# Altium PCB Chiller.PcbDoc (part 2 of 2)
Units mil, origin at the board's own origin, x right, y up, seen from the top; angles counter-clockwise.
Board outline 5081 x 4370 mil, 2 copper layers (Top Layer, Bottom Layer); 139 components, 120 nets, 485 pads, 196 vias.
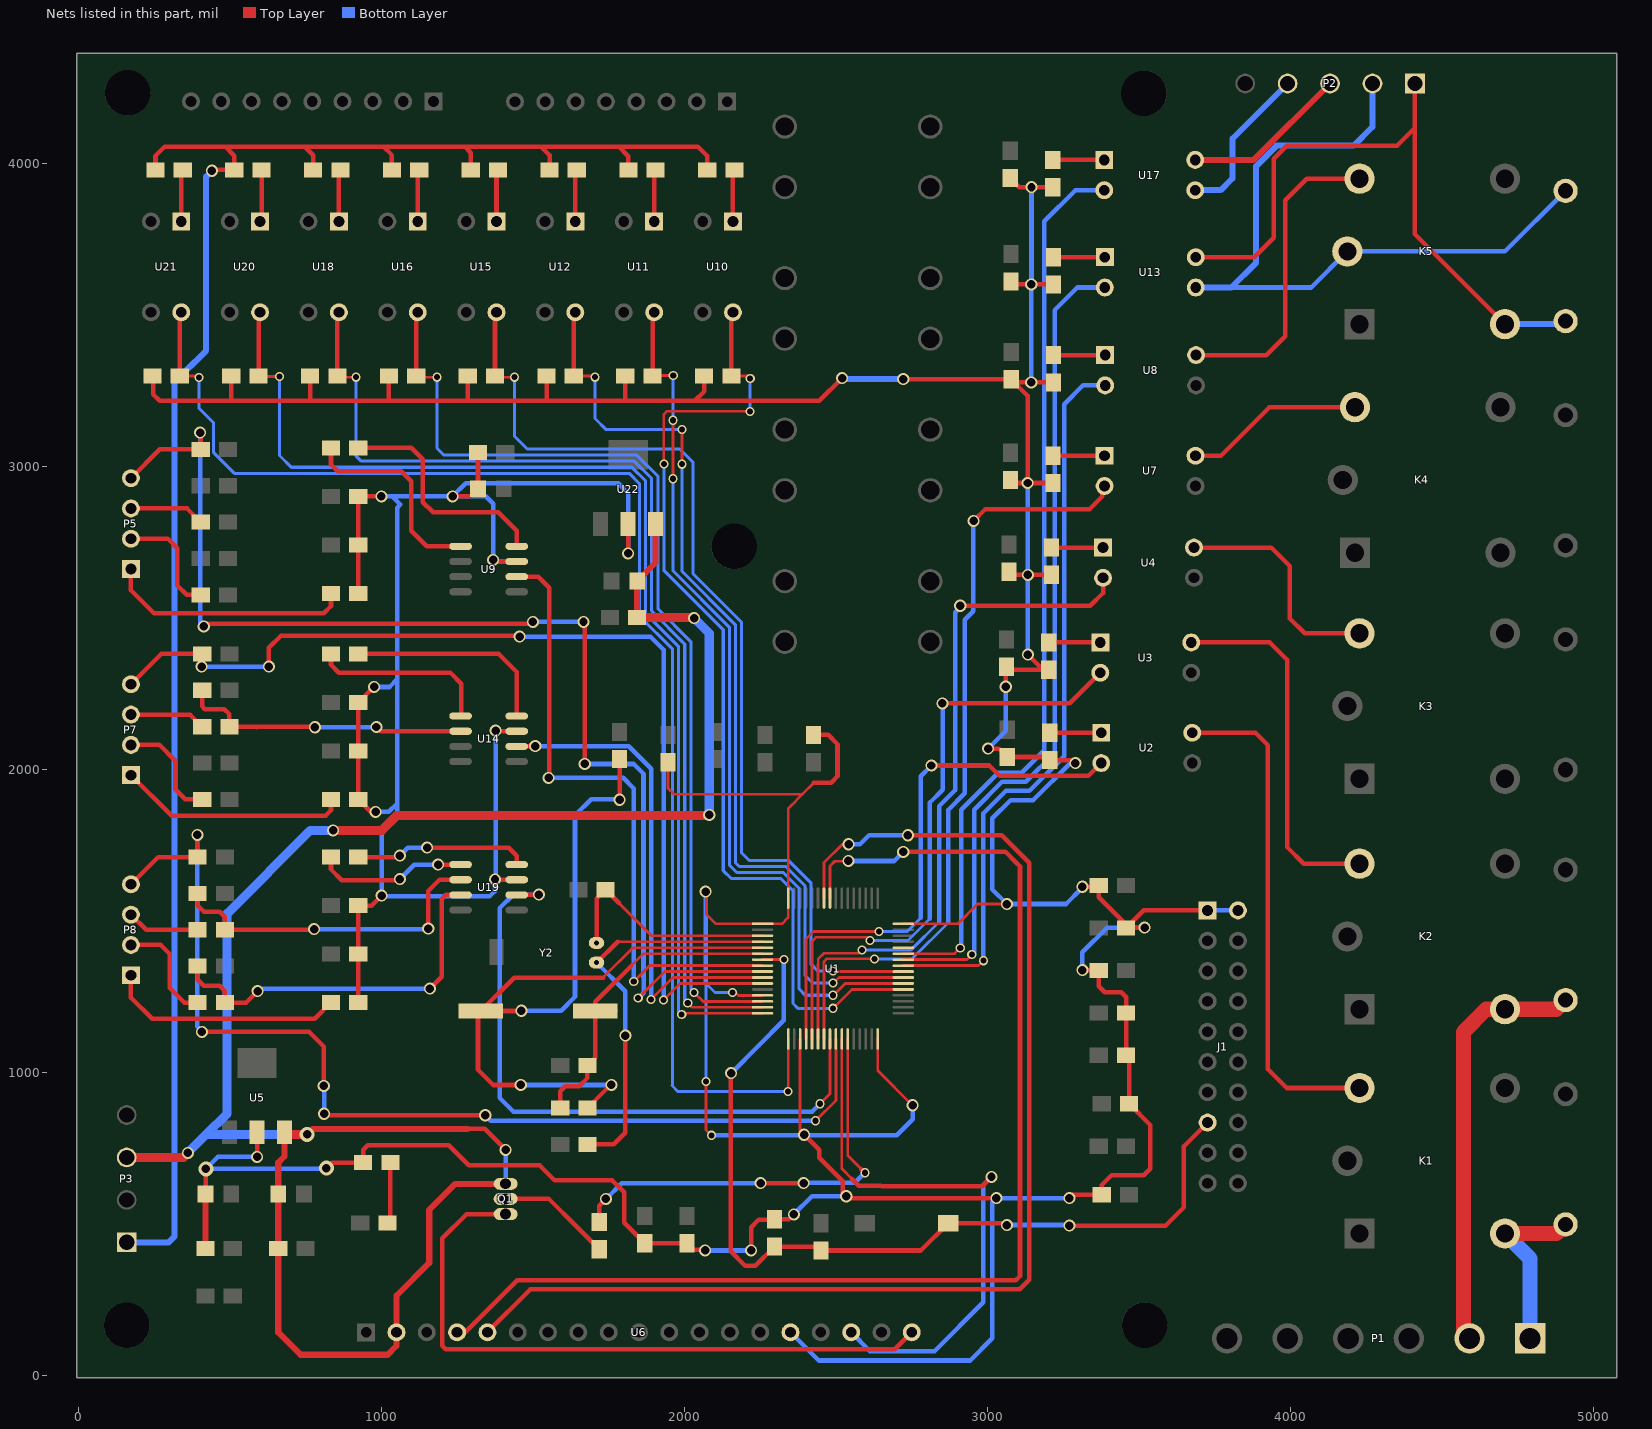
[diagram p2: the nets of this part, all layers, seen from the top]

## Via types
v1: diameter 40, hole 28, Top Layer to Bottom Layer, 144 vias
v2: diameter 30, hole 20, Top Layer to Bottom Layer, 47 vias
v3: diameter 50, hole 28, Top Layer to Bottom Layer, 5 vias

## Nets (pads, with @x,y where several pads share a name; then routed paths per layer and width w, separated by ;. In a path a pad name is that pad's centre, name@x,y a point inside that pad or via, vN(x,y) a via of type N, cw(c..) or ccw(c..) an arc to the next point about the centre after c; other vN are vias at no path point) (continued)
NetC31_1: C31.1 R38.2 U14.2 | length 967.1
  Top Layer w15: C31.1@409,2261 409,2208 418,2199 482,2199 499,2182 R38.2@499,2141 550,2141 587,2141 ; 589,2139 587,2141 ; v1(781,2139) 779,2141 587,2141 ; v1(984,2140) 998,2126 U14.2@1261.48,2126
  Bottom Layer w15: v1(781,2139) 983,2139 v1(984,2140)
NetC34_1: C34.1 R45.2 U19.3 | length 1262.8
  Top Layer w15: C34.1@394,1351 394,1306 414,1286 467,1286 484,1269 R45.2@484,1231 554,1231 v1(592,1269) ; v1(1160,1277) 1199,1316 1199,1572 1213,1586 U19.3@1261.48,1586
  Bottom Layer w15: v1(592,1269) 600,1277 v1(1160,1277)
NetC35_1: C35.1 R49.2 U19.2 | length 1107.6
  Top Layer w15: C35.1@394,1591 394,1551 415,1530 466,1530 467,1531 484,1514 R49.2@484,1471 776,1471 v1(778,1473) ; v1(1155,1475) 1155,1599 1192,1636 U19.2@1261.48,1636
  Bottom Layer w15: v1(778,1473) 1153,1473 v1(1155,1475)
NetD1_1: D1.1 R14.1 | length 202.9
  Top Layer w15: D1.1@1020.28,504.12 1030,513.84 R14.1@1030,703
NetK1_4: K1.4 U2.4 | length 1663.7
  Top Layer w15: U2.4@3675,2121 3800,2121 3884,2121 3925,2080 3925,1011 3987,949 K1.4@4227,949
NetK2_4: K2.4 U3.4 | length 1219.4
  Top Layer w15: U3.4@3672,2419 3822,2419 3931,2419 3988,2362 3988,1744 4043,1689 K2.4@4227,1689
NetK3_4: K3.4 U4.4 | length 778.6
  Top Layer w15: U4.4@3681,2732 3811,2732 ; 3825,2732 3811,2732 ; K3.4@4227,2449 4046,2449 3997,2498 3997,2671 3936,2732 3811,2732
NetK4_4: K4.4 U7.4 | length 592.3
  Top Layer w15: U7.4@3686,3035 3770,3035 3930,3195 K4.4@4212,3195
NetK5_4: K5.4 U8.4 | length 1043.1
  Top Layer w15: U8.4@3688,3367 3920,3367 3982,3429 3982,3878 4053,3949 K5.4@4227,3949
NetQ1_1: Q1.1 U6.19 | length 2207.3
  Top Layer w15: 1201,242 1201,208 ; Q1.1@1410,533 1281,533 1201,453 1201,208 ; U6.19@2750,143 2694,87 1213,87 1201,99 1201,208
NetQ1_2: Q1.2 R16.2 | length 546.1
  Top Layer w15: Q1.2@1410,583 1553,583 R16.2@1719,417 1600,536
NetR3_2: R3.2 U2.1 | length 170
  Top Layer w15: R3.2@3205,2121 U2.1@3375,2121
NetR8_2: R8.2 U3.1 | length 170
  Top Layer w15: R8.2@3202,2419 U3.1@3372,2419
NetR12_2: R12.2 U4.1 | length 170
  Top Layer w15: R12.2@3211,2732 U4.1@3381,2732
NetR15_2: R15.2 U7.1 | length 170
  Top Layer w15: R15.2@3216,3035 U7.1@3386,3035
NetR18_2: R18.2 U8.1 | length 170
  Top Layer w15: R18.2@3218,3367 U8.1@3388,3367
NetR19_1: R19.1 U10.1 | length 172.1
  Top Layer w15: U10.1@2160,3808 2160,3973 R19.1@2165,3978
NetR22_1: R22.1 U9.1 | length 690.4
  Top Layer w15: R22.1@834,3061 834,3006 856,2984 1066,2984 1099,2951 1099,2787 1150,2736 U9.1@1261.48,2736
NetR22_2: R22.2 U9.8 | length 769.9
  Top Layer w15: R22.2@924,3061 1099,3061 1137,3023 1137,2882 1171,2848 1386,2848 1446.52,2787.48 U9.8@1446.52,2736
NetR23_1: R23.1 U11.1 | length 172.1
  Top Layer w15: U11.1@1900,3808 1900,3973 R23.1@1905,3978
NetR27_2: R27.2 U13.1 | length 170
  Top Layer w15: R27.2@3217,3690 U13.1@3387,3690
NetR28_1: R28.1 U12.1 | length 172.1
  Top Layer w15: U12.1@1640,3808 1640,3973 R28.1@1645,3978
NetR31_1: R31.1 U15.1 | length 172.1
  Top Layer w15: U15.1@1380,3808 1380,3973 R31.1@1385,3978
NetR34_1: R34.1 U14.1 | length 599.7
  Top Layer w15: R34.1@834,2381 834,2345 860,2319 1228,2319 1264,2283 1264,2178.52 U14.1@1261.48,2176
NetR34_2: R34.2 U14.8 | length 692.7
  Top Layer w15: R34.2@924,2381 1387,2381 1446.52,2321.48 U14.8@1446.52,2176
NetR35_1: R35.1 U16.1 | length 172.1
  Top Layer w15: U16.1@1120,3808 1120,3973 R35.1@1125,3978
NetR37_2: R37.2 U17.1 | length 170
  Top Layer w15: R37.2@3215,4011 U17.1@3385,4011
NetR40_1: R40.1 U18.1 | length 172.1
  Top Layer w15: U18.1@860,3808 860,3973 R40.1@865,3978
NetR43_1: R43.1 U20.1 | length 172.1
  Top Layer w15: U20.1@600,3808 605,3813 R43.1@605,3978
NetR46_1: R46.1 U19.1 | length 504.1
  Top Layer w15: R46.1@834,1711 834,1670 869,1635 1058,1635 v1(1061,1638) ; v1(1187,1686) U19.1@1261.48,1686
  Bottom Layer w15: v1(1061,1638) 1109,1686 v1(1187,1686)
NetR46_2: R46.2 U19.8 | length 575.8
  Top Layer w15: R46.2@924,1711 1056,1711 v1(1061,1716) ; v1(1151,1742) 1420,1742 1446.52,1715.48 U19.8@1446.52,1686
  Bottom Layer w15: v1(1061,1716) 1087,1742 v1(1151,1742)
NetR47_1: R47.1 U21.1 | length 172.1
  Top Layer w15: U21.1@340,3808 340,3973 R47.1@345,3978
OSC_IN1: C2.2 U1.3 Y2.2 | length 768.3
  Top Layer w9: 1784.52,1558.48 1850.55,1492.45 1891.64,1451.36 2200.79,1451.36 2200.89,1451.46 2257.47,1451.46 U1.3@2257.57,1451.36
  Top Layer w15: Y2.2@1710,1427.57 1710,1573 C2.2@1740,1603 1784.52,1558.48
OSC_IN2: C1.2 R1.2 U1.5 Y1.1 | length 3047.3
  Top Layer w9: 1732,1313 1830.99,1411.99 U1.5@2257.57,1411.99
  Top Layer w15: v1(1460,959) 1369,959 1319,1009 1319,1194 Y1.1@1328,1203 ; v1(1462,1204) 1461,1203 Y1.1@1328,1203 ; R1.2@1680,883 1756,959 v1(1759,959) ; 1732,1313 1438,1313 Y1.1@1328,1203 ; v1(1786,1900) C1.2@1786,2034
  Bottom Layer w15: v1(1460,959) v1(1759,959) ; v1(1462,1204) 1593,1204 1639,1250 1639,1777 ; 1639,1806 1639,1777 ; v1(1786,1900) 1784,1902 1692,1902 1639,1849 1639,1777
OSC_OUT1: C7.2 U1.4 Y2.1 | length 1416.2
  Top Layer w9: Y2.1@1710,1363 1778.68,1431.68 1779.67,1431.68 U1.4@2257.57,1431.68
  Top Layer w15: C7.2@1680,763 1767,763 1805,801 v1(1805,1122) ; Y2.1@1710,1363 1711,1363 1779.67,1431.68
  Bottom Layer w15: Y2.1@1710,1363 1805,1268 v1(1805,1122)
OSC_OUT2: C6.2 R1.1 U1.6 Y1.2 | length 1051.4
  Top Layer w9: 1824,1351.57 1864.73,1392.31 U1.6@2257.57,1392.31
  Top Layer w15: R1.1@1590,883 1590,938 1607,955 1649,955 1653,955 1680,982 C6.2@1680,1023 1706,1049 Y1.2@1706,1203 1706,1233.57 1824,1351.57 ; Y1.2@1768,1198 Y1.2@1774,1204
OUT1+: C44.2 K5.1 P2.1 U13.4 | length 2188.1
  Top Layer w15: U13.4@3687,3690 3880,3690 3944,3754 3944,4015 3987,4058 4351,4058 4410,4117 ; P2.1@4410,4263 4410,4117 ; K5.1@4707,3469 4410,3766 4410,4117
  Top Layer w50: C44.2@4897,3469 C44.2@4907,3479
  Bottom Layer w10: C44.2@4897,3469 C44.2@4907,3479
  Bottom Layer w20: K5.1@4707,3469 C44.2@4897,3469
OUT1-: C44.1 K5.2 P2.2 U13.3 | length 2369.8
  Bottom Layer w15: U13.3@3685,3592 U13.3@3687,3590 ; 3804,3590 4068,3590 K5.2@4187,3709 4707,3709 C44.1@4907,3909
  Bottom Layer w20: U13.3@3687,3590 3804,3590 3886,3672 3886,3990 3954,4058 4208,4058 4270,4120 P2.2@4270,4263
OUT2+: P2.3 U17.4 | length 549.4
  Top Layer w20: U17.4@3685,4011 3847,4011 3878,4011 P2.3@4130,4263
OUT2-: P2.4 U17.3 | length 527.5
  Bottom Layer w20: U17.3@3685,3911 3769,3911 3808,3950 3808,4039 3808,4081 P2.4@3990,4263
PIN_IN1: U1.8 U9.6 | length 2640.1
  Top Layer w9: 1885.47,1352.94 U1.8@2257.57,1352.94 1885.47,1352.94 ; 1885.47,1352.94 1867.5,1334.97 v2(1832.82,1300.29) 1885.47,1352.94
  Top Layer w15: U9.6@1446.52,2636 1517.5,2636 1553.5,2600 1553.5,2040 ; v1@1553.5,1973.5 1553.5,2040 ; v1@1553.5,1984.5 1553.5,2040
  Bottom Layer w15: v1@1541,1972 v1(1552,1972) 1798,1972 1832.82,1937.18 v2(1832.82,1300.29)
PIN_IN2: P5.4 R26.1 U1.9 | length 4146.7
  Top Layer w9: v2(1847.5,1245.29) 1935.47,1333.25 U1.9@2257.57,1333.25
  Top Layer w15: P5.4@174,2961 269,3056 R26.1@404,3056 ; R26.1@402,3058 R26.1@404,3056 ; v1(402,3111) 404,3109 R26.1@404,3056 ; v1(414,2472) 423,2481 1494,2481 v1(1500,2487) ; v1(1667,2487) 1671,2483 v1(1671,2018)
  Bottom Layer w15: v1(402,3111) 402,2484 v1(414,2472) ; v1@1502,2489 v1(1500,2487) v1(1667,2487) ; v1(1671,2018) 1833,2018 1865,1986 1865,1417 ; v2(1847.5,1245.29) 1865.32,1263.1 1865.32,1314.07 1865,1314.38 1865,1417 ; 1865,1457 1865,1417
PIN_IN3: U1.10 U14.6 | length 1634.4
  Top Layer w9: v2(1890,1241) 1962.57,1313.57 U1.10@2257.57,1313.57
  Top Layer w15: U14.6@1446.52,2076 1447.52,2077 v1(1508,2077)
  Bottom Layer w15: v1(1508,2077) 1816,2077 1890.32,2002.68 1890.32,1241.32 v2(1890,1241)
PIN_IN4: P7.4 R39.1 U1.11 | length 3446.2
  Top Layer w9: v2(1931,1239) 1985.88,1293.88 U1.11@2257.57,1293.88
  Top Layer w15: P7.4@174,2281 274,2381 R39.1@409,2381 409,2341 v1(407,2339) ; v1(629,2339) 629,2401 669,2441 1453,2441 v1(1456,2438)
  Bottom Layer w15: v1(407,2339) v1(629,2339) ; v1(1456,2438) 1888,2438 1931,2395 v2(1931,1239)
PIN_IN5: U1.24 U19.6 | length 2161.8
  Top Layer w9: v2(2447,897) 2480.01,930.01 U1.24@2480.01,1110.81
  Top Layer w15: U19.6@1446.52,1586 1447.52,1587 v1(1520,1587)
  Bottom Layer w15: v1(1520,1587) 1435,1587 1390,1542 1390,917 1436,871 2421,871 v2(2447,897)
PIN_IN6: P8.4 R50.1 U1.25 | length 3563.7
  Top Layer w9: v2(2433,841) 2499.69,907.69 U1.25@2499.69,1110.81
  Top Layer w15: P8.4@174,1621 264,1711 R50.1@394,1711 393,1712 v1(393,1784) ; v1(408,1134) 762,1134 810,1086 v1(810,956) ; v1(811,864) 816,859 v1(1343,859)
  Bottom Layer w15: v1(393,1784) 393,1152 408,1137 v1(408,1134) ; v1(810,956) 811,955 v1(811,864) ; v1@1345.5,861.5 v1(1343,859) 1361,841 v2(2433,841)
PIN_IN7: R20.2 U1.37 U10.4 | length 3287.8
  Top Layer w9: v2(1932,3008) 1932,3171 1943,3182 2215,3182 v2(2216,3181) ; R20.2@2155,3298 2209,3298 v2(2217,3290) ; v2(2490,1212) 2552.2,1274.2 U1.37@2722.13,1274.2
  Top Layer w15: R20.2@2155,3298 2155,3503 U10.4@2160,3508
  Bottom Layer w10: v2(1932,3008) 1932,2657 2128,2461 2128,1666 2154,1640 2318,1640 2358,1600 2358,1228 2374,1212 v2(2490,1212) ; v2(2216,3181) 2216,3289 v2(2217,3290)
PIN_IN8: R24.2 U1.38 U11.4 | length 2936.4
  Top Layer w9: R24.2@1895,3298 1897,3300 v2(1963,3300) ; v2(1962,2959) v2(1962,3152) ; v2(2490,1255) 2491.72,1255 2530.6,1293.88 U1.38@2722.13,1293.88
  Top Layer w15: R24.2@1895,3298 1895,3503 U11.4@1900,3508
  Bottom Layer w10: v2(1962,2959) 1962,2655.28 2148,2469.28 2148,1685 2173,1660 2326.28,1660 2378,1608.28 2378,1276 2399,1255 v2(2490,1255) ; v2(1962,3152) 1962,3299 v2(1963,3300)
PIN_IN9: R29.2 U1.39 U12.4 | length 3122.6
  Top Layer w9: R29.2@1635,3298 1701,3298 v2(1705,3294) ; v2(1992,3007) v2(1992,3121) ; v2(2490,1295) 2491.72,1295 2510.29,1313.57 U1.39@2722.13,1313.57
  Top Layer w15: R29.2@1635,3298 1635,3503 U12.4@1640,3508
  Bottom Layer w10: v2(1705,3294) 1705,3158 1742,3121 v2(1992,3121) ; v2(1992,3007) 1992,2653.57 2168,2477.57 2168,1693.28 2181.28,1680 2334.57,1680 2398,1616.57 2398,1321 2424,1295 v2(2490,1295)
PIN_IN10: R32.2 U1.40 U15.4 | length 3305.2
  Top Layer w9: R32.2@1375,3298 1379,3294 v2(1439,3294) ; v2(2490,1335) 2491.75,1333.25 U1.40@2722.13,1333.25
  Top Layer w15: R32.2@1375,3298 1375,3503 U15.4@1380,3508
  Bottom Layer w10: v2(1439,3294) 1439,3099 1481,3057 1984.43,3057 2028,3013.43 2028,2645.85 2188,2485.85 2188,1725 2213,1700 2342.85,1700 2418,1624.85 2418,1357 2440,1335 v2(2490,1335)
PIN_IN11: R36.2 U1.14 U16.4 | length 3274
  Top Layer w9: R36.2@1115,3298 1119,3294 v2(1184,3294) ; v2(2032.19,1264.38) 2062.07,1234.5 2257.24,1234.5 U1.14@2257.57,1234.83
  Top Layer w15: R36.2@1115,3298 1115,3503 U16.4@1120,3508
  Bottom Layer w10: v2(1184,3294) 1184,3060 1207,3037 1842.85,3037 1912,2967.85 1912,2530.67 2021,2421.67 2021,1275.57 v2(2032.19,1264.38)
PIN_IN12: R41.2 U1.15 U18.4 | length 3573.1
  Top Layer w9: R41.2@855,3298 859,3294 v2(916,3294) ; v2(2011,1229) 2024.86,1215.14 U1.15@2257.57,1215.14
  Top Layer w15: R41.2@855,3298 855,3503 U18.4@860,3508
  Bottom Layer w10: v2(916,3294) 916,3035 934,3017 1834.57,3017 1892,2959.57 1892,2522.39 2001,2413.39 2001,1239 v2(2011,1229)
PIN_IN13: R44.2 U1.16 U20.4 | length 3861.6
  Top Layer w9: R44.2@595,3298 597,3296 v2(664,3296) ; v2(1991,1192) 1994.46,1195.46 U1.16@2257.57,1195.46
  Top Layer w15: R44.2@595,3298 595,3503 U20.4@600,3508
  Bottom Layer w10: v2(664,3296) 664,3036 703,2997 1826.28,2997 1872,2951.28 1872,2514.1 1981,2405.1 1981,1202 v2(1991,1192)
PIN_IN14: R48.2 U1.17 U21.4 | length 4590.4
  Top Layer w9: R48.2@335,3298 394,3298 v2(399,3293) ; v2(2342,937) 2342.21,937.21 U1.17@2342.21,1110.81
  Top Layer w15: R48.2@335,3298 335,3503 U21.4@340,3508
  Bottom Layer w10: v2(399,3293) 399,3191 447,3143 447,3045 515,2977 1818,2977 1852,2943 1852,2505.82 1961,2396.82 1961,959 1959,957 1979,937 v2(2342,937)
PIN_OUT1: U1.20 U2.2 | length 1846.5
  Top Layer w9: U1.20@2401.27,1110.81 2401.27,1257.73 2401.27,1440.27 2426,1465 2641,1465 v2(2642,1466)
  Top Layer w15: v1(2815,2013) 3006.18,2013 3040.68,1978.5 3332.5,1978.5 U2.2@3375,2021
  Bottom Layer w10: v2(2642,1466) 2736,1466 2780,1510
  Bottom Layer w15: 2780,1510 2780,1978 v1(2815,2013)
PIN_OUT2: U1.21 U3.2 | length 2042.5
  Top Layer w9: U1.21@2420.95,1110.81 2420.95,1433.08 2433.87,1446 2601,1446 v2(2612,1435)
  Top Layer w15: v1(2851,2218) 3271,2218 U3.2@3372,2319
  Bottom Layer w10: v2(2612,1435) 2613,1436 2737.82,1436 2809.82,1508 2810,1508
  Bottom Layer w15: 2810,1508 2810,1890.9 2852.5,1933.4 2852.5,2216.5 v1(2851,2218)
PIN_OUT3: U1.22 U4.2 | length 2323.6
  Top Layer w9: U1.22@2440.64,1110.81 2440.64,1357 2441.32,1357.69 2441.32,1374.19 2461.13,1394 2575.43,1394 v2(2585.93,1404.5)
  Top Layer w15: v1(2910,2540) 3339,2540 3381,2582 U4.2@3381,2632
  Bottom Layer w10: v2(2585.93,1404.5) 2586.43,1405 2748,1405 2840,1497
  Bottom Layer w15: 2840,1497 2840,1878.47 2893.5,1931.97 2893.5,2518.5 2910,2535 v1(2910,2540)
PIN_OUT4: U1.23 U7.2 | length 2578.4
  Top Layer w9: U1.23@2460.32,1110.81 2460.32,1366.32 2469,1375 v2(2627,1375)
  Top Layer w15: v1(2954,2820) 2993,2859 3337,2859 3379,2901 3379,2935 U7.2@3386,2935
  Bottom Layer w10: v2(2627,1375) 2751,1375 2871,1495
  Bottom Layer w15: 2871,1495 2871,1867.04 2925,1921.04 2925,2494 2952.5,2521.5 2952.5,2818.5 v1(2954,2820)
PIN_OUT5: U1.41 U8.2 | length 2457.3
  Top Layer w9: U1.41@2722.13,1352.94 2946.18,1352.94 2969.94,1352.94 v2(2986,1369)
  Bottom Layer w15: v2(2986,1369) 2986,1428 ; 2986,1394 2986,1854.76 3060.24,1929 3138,1929 3253,2044 3253,3205 3315,3267 U8.2@3388,3267
PIN_OUT6: U1.42 U13.2 | length 2839.2
  Top Layer w9: 2847,1372.62 U1.42@2722.13,1372.62 2931.62,1372.62 v2(2948,1389)
  Bottom Layer w15: v2(2948,1389) 2956,1397 2956,1867.19 3047.81,1959 3125.57,1959 3221,2054.43 3221,3515 3296,3590 U13.2@3387,3590
PIN_OUT7: U1.43 U17.2 | length 2993.6
  Top Layer w9: U1.43@2722.13,1392.31 2891.31,1392.31 v2(2910,1411)
  Bottom Layer w15: v2(2910,1411) 2913.5,1414.5 2913.5,1867.12 3035.38,1989 3113.15,1989 3187,2062.85 3187,3808 3290,3911 U17.2@3385,3911
PIN_OUT8: U1.44
PUMP: C40.2 K1.1 P1.1 | length 592.8
  Top Layer w50: K1.1@4707,469 4877,469 C40.2@4907,499
  Bottom Layer w50: K1.1@4707,469 4790,386 P1.1@4790,123
PWM: R16.1 U1.27 | length 1455
  Top Layer w9: U1.27@2539.06,1110.81 2539.06,725.46 v2(2595.02,669.5)
  Top Layer w15: R16.1@1719,507 1719,561 v1(1741,583) ; v1(2251,635) v1(2393,635) ; 2584.02,680.5 v2(2595.02,669.5)
  Bottom Layer w15: v1(1741,583) 1793,635 v1(2251,635) ; v1(2393,635) 2394,636 2561.52,636 v2(2595.02,669.5)
R/W: U1.58 U6.5 | length 4103.9
  Top Layer w9: U1.58@2460.32,1575.38 2460.32,1692.75 2520.57,1753 v1(2541.52,1753)
  Top Layer w15: U6.5@1350,143 1492.03,285.03 3105.75,285.03 3137,316.28 3137,1692.43 3046.43,1783 v1(2737.5,1783)
  Bottom Layer w15: v1(2541.52,1753) 2579,1753 2609,1783 v1(2737.5,1783)
RESET: C13.2 J1.15 R9.1 REST1.1 U1.7 | length 3049
  Top Layer w9: U1.7@2257.57,1372.62 2327.62,1372.62 v2(2328,1373)
  Top Layer w15: v1(2154,998) 2153,997 2153,410 2200,363 2234,363 R9.1@2297,426 2437,426 C13.2@2450,413 2780,413 REST1.1@2870,503 3058,503 v1(3064,497) ; v1(3270,495) 3587,495 3648,556 3648,757 J1.15@3726,835
  Bottom Layer w15: v1(2154,998) 2244.5,1088.5 ; 2258.5,1102.5 2244.5,1088.5 ; v2(2328,1373) 2328,1172 2244.5,1088.5 ; v1(3064,497) 3268,497 v1(3270,495)
RS: U1.57 U6.4 | length 4065.9
  Top Layer w9: U1.57@2480.01,1575.38 2480.03,1681.34 2495.84,1697.16 2507.16,1697.16 2540.16,1697.16 v1(2541,1698)
  Top Layer w15: U6.4@1250,143 1276.42,143 1448.45,315.03 3093.32,315.03 3107,328.71 3107,1680 3096,1691 ; v1(2722,1728) 3059,1728 3096,1691 ; 3090,1697 3096,1691
  Bottom Layer w15: v1(2541,1698) 2692,1698 v1(2722,1728)
RST: U1.26 U6.17 | length 1914.1
  Top Layer w9: U1.26@2519.38,1110.81 2519.38,682.62 2552.52,649.48
  Top Layer w15: 2552.52,649.48 2575,627 2649,627 2651,625 2982,625 v1(3013,656)
  Bottom Layer w15: U6.17@2550,143 2612,81 2825,81 2985.94,241.94 2985.94,628.94 v1@3011,654 ; v1@3011,656 v1@3011,654 ; v1(3013,656) v1@3011,654
"TEMP1 DRV+": P5.1 R17.1 | length 813.4
  Top Layer w15: P5.1@174,2661 174,2591 250,2515 810,2515 834,2539 R17.1@834,2581
"TEMP1 SEN+": P5.2 R21.1 | length 378.7
  Top Layer w15: P5.2@174,2761 296,2761 327,2730 327,2607 358,2576 R21.1@404,2576
"TEMP1 SEN-": P5.3 R25.1 | length 248.6
  Top Layer w15: P5.3@174,2861 359,2861 R25.1@404,2816
"TEMP2 DRV+": P7.1 R30.1 | length 759
  Top Layer w15: P7.1@174,1981 308,1847 816,1847 834,1865 R30.1@834,1901
"TEMP2 SEN+": P7.2 R33.1 | length 364.6
  Top Layer w15: P7.2@174,2081 268,2081 320,2029 320,1935 353,1902 408,1902 R33.1@409,1901
"TEMP2 SEN-": P7.3 R38.1 | length 251.6
  Top Layer w15: P7.3@174,2181 369,2181 R38.1@409,2141
"TEMP3 DRV+": P8.1 R42.1 | length 785.1
  Top Layer w15: P8.1@174,1321 174,1247 243.73,1177.27 780.27,1177.27 R42.1@834,1231
"TEMP3 SEN+": P8.2 R45.1 | length 364.3
  Top Layer w15: P8.2@174,1421 272,1421 302,1391 302,1279 350,1231 R45.1@394,1231
"TEMP3 SEN-": P8.3 R49.1 | length 240.7
  Top Layer w15: P8.3@174,1521 224,1471 R49.1@394,1471
VALVE: C41.2 K2.1 P1.2 | length 1399.8
  Top Layer w50: P1.2@4590,123 4570,143 4570,1072 4570,1134 4645,1209 K2.1@4707,1209 4877,1209 C41.2@4907,1239
VCC3.3: C3.2 C4.1 C5.2 C8.2 C9.1 C10.2 C11.1 C12.1 C14.2 C15.1 C16.1 C17.1 C20.2 C21.2 C25.2 C29.2 J1.1 J1.2 R3.1 R4.2 R5.2 R6.2 R7.2 R8.1 R9.2 R12.1 R14.2 R15.1 R18.1 R20.1 R24.1 R27.1 R29.1 R32.1 R36.1 R37.1 R41.1 R44.1 R48.1 U1.1 U1.13 U1.19 U1.32 U1.48 U1.64 U5.2 U6.15 | length 19209.5
  Top Layer w9: C12.1@1946,2024 1946,1938 1965.5,1918.5 2389.5,1918.5 ; v2(2071,971) 2071,811 v2(2089,793) ; v1@2073,1594 2073,1522 2104.27,1490.73 U1.1@2257.57,1490.73 ; v2(2158,1264) 2168.88,1264 2178.37,1254.51 U1.13@2257.57,1254.51 ; U1.1@2258.73,1490.73 2321.73,1490.73 2342.21,1511.21 U1.64@2342.21,1575.38 2342.21,1871.21 2347.64,1876.64 ; 2354.46,1883.46 2347.64,1876.64 ; v1@2381.58,808.42 U1.19@2381.58,1110.81 ; 2427,1956 2389.5,1918.5 ; U1.32@2637.49,1110.81 2637.49,1007.51 v1(2753,892) ; U1.48@2722.13,1490.73 2901.73,1490.73 2967,1556 v1(3064,1556) ; 2347.64,1876.64 2389.5,1918.5
  Top Layer w15: R48.1@245,3298 248,3295 248,3237 269,3216 506,3216 ; C17.1@420,599.03 421,600.03 v3(421,682) ; R44.1@505,3298 505,3217 506,3216 ; v1(590,722) U5.2@590,803 ; R41.1@765,3298 765,3218 767,3216 ; v3(819,685) 837,703 R14.2@940,703 940,745 955,760 1222,760 1288,694 1522,694 1572,644 1762,644 1801,605 1801,505 C15.1@1869,437 C3.2@2009,437 2031,415 2066,415 v1(2068,413) ; R36.1@1025,3298 1025,3217 1026,3216 ; R32.1@1285,3298 1285,3217 1286,3216 ; R29.1@1545,3298 1545,3217 1546,3216 ; R24.1@1805,3298 1805,3216 ; R20.1@2065,3298 2065,3247 2034,3216 ; v1@2220,414 2220,490 2245,515 2296,515 R9.2@2297,516 2345,516 ; v1(2395,795) 2444.52,745.48 2444.52,719 2522.52,641 v1@2522.52,603.48 ; C8.2@2426,2114 2474,2114 2505,2083 2505,1977 2484,1956 2427,1956 ; v1(2520,3291) 2445,3216 2034,3216 ; v1@2552,586 v1(3029,586) ; v1(2722,3288) 2723,3287 C14.2@3078,3287 ; v1(3002,2069) 3037,2069 C29.2@3065,2041 ; C29.2@3060,2036 C29.2@3065,2041 ; v1(3060,2273) 3060,2337 C25.2@3062,2339 3072,2329 R8.1@3202,2329 3183,2329 v1(3133,2379) ; C21.2@3071,2652 3081,2642 v1(3133,2642) R12.1@3211,2642 ; C10.2@3075,3951 3105,3921 v1(3145,3921) ; C20.2@3076,2955 3086,2945 v1(3132,2945) ; C5.2@3077,3610 3087,3600 v1(3144,3600) R27.1@3217,3600 ; v1@3144,3920 v1(3145,3921) ; R37.1@3215,3921 v1(3145,3921) ; R15.1@3216,2945 v1(3132,2945) ; R18.1@3218,3277 3145,3277 v1(3144,3277) 3088,3277 C14.2@3078,3287 ; v1@3281,597 R4.2@3377,597 3377,629 3409,661 3515,661 3537,683 3537,827 C11.1@3467,897 3467,1047 R5.2@3457,1057 R7.2@3457,1197 3457,1249 3441,1265 3387,1265 3367,1285 C4.1@3367,1337 3314,1337 v1(3313,1338) ; v1(3290.1,2021) 3280.1,2031 R3.1@3205,2031 3195,2041 C29.2@3065,2041 ; v1(3313,1613) 3363,1613 C9.1@3367,1617 3367,1578 3457,1488 R6.2@3457,1477 R6.2@3458,1478 ; v1(3518,1478) R6.2@3458,1478 ; J1.1@3726,1535 3515,1535 R6.2@3458,1478 ; 506,3216 767,3216 ; 767,3216 1026,3216 ; 1026,3216 1286,3216 ; 1286,3216 1546,3216 ; 1546,3216 1805,3216 ; 1805,3216 2034,3216 ; C14.2@3078,3287 3132,3233 v1(3132,2945)
  Top Layer w20: C16.1@420,419.03 C17.1@420,599.03
  Bottom Layer w10: v3(421,682) 421,683 v3@423,685 ; v2(2071,971) 2071,1294 2101,1264 v2(2158,1264)
  Bottom Layer w15: v1(590,722) 461,722 v3(421,682) 816,682 v3(819,685) ; v1(2068,413) v1(2220,413) v1@2218,413 ; 2071,1294 v1@2071,1596 ; v2(2089,793) v1@2395,793 ; U6.15@2350,143 2443,50 2943,50 3015.94,122.94 v1@3015.94,572.94 ; v1(2361,532) 2421,592 v1(2534,592) ; v1@2397,793 2700,793 2753,846 v1(2753,892) ; v1(3002,2069) 3060,2127 v1(3060,2273) ; v1(3029,586) v1(3270,586) ; v1(3132,2945) 3133,2944 v1(3133,2642) v1(3133,2379) ; v1(3144,3277) v1(3144,3600) 3145,3601 v1(3145,3921) ; v1(3290.1,2021) 3272.43,2021 3150.43,1899 3076,1899 3016,1839 3016,1604 v1(3064,1556) 3259,1556 3313,1610 v1(3313,1613) ; v1(3313,1338) 3313,1397 3394,1478 v1(3518,1478) ; J1.1@3726,1535 J1.2@3826,1535
  Bottom Layer w20: v3(819,685) v3@820,685 ; v1(2520,3291) 2523,3288 v1(2722,3288)
  other v1: 2070,1597
VCC3.3_A: C22.2 C23.2 C27.2 C28.2 C32.2 C33.2 C36.1 C37.1 R17.2 R30.2 R42.2 U9.7 U14.7 U19.7 U22.2 | length 5639.4
  Top Layer w15: R42.2@924,1231 C32.2@924,1391 C33.2@924,1551 968,1551 v1(1001,1584) ; R17.2@924,2581 C22.2@924,2741 C23.2@924,2901 v1(1000,2901) ; v1(976,2272) 975,2272 C28.2@924,2221 C27.2@924,2061 R30.2@924,1901 965,1860 v1(981,1860) ; v1(1235,2901) 1294,2901 C37.1@1319,2926 C36.1@1319,3046 ; v1(1369,2691) 1374,2686 U9.7@1446.52,2686 ; v1(1375,1637) 1376,1636 U19.7@1446.52,1636 ; v1(1377,2128) 1379,2126 U14.7@1446.52,2126 ; v1(1814,2713) U22.2@1814,2809.98
  Bottom Layer w15: v1(976,2272) 1027,2272 1052,2297 ; v1(981,1860) 1025,1860 1052,1887 ; v1(1000,2901) 1036,2901 ; v1@1239,2897 v1(1235,2901) ; v1(1369,2691) 1370,2692 1382,2692 1369,2705 1369,2877 1345,2901 v1(1235,2901) ; v1(1377,2128) 1377,1639 v1(1375,1637) 1375,1599 1357,1581 1004,1581 v1(1001,1584) 1001,1790 1052,1841 1052,1887 ; v1(1814,2713) 1814,2912 1782,2944 1278,2944 v1(1235,2901) ; 1036,2901 1063,2874 1052,2863 1052,2297 ; 1036,2901 v1(1235,2901) ; 1052,1887 1052,2297
VCC5: C18.1 C19.1 C38.1 C39.1 P3.3 Q1.3 U5.3 U6.2 U22.3 | length 7038.7
  Top Layer w15: 1284,814 1341,814 v1(1410,745)
  Top Layer w20: U5.3@687.55,796 U5.3@680.55,803 680.55,723.55 660,703 C18.1@660,599.03 C19.1@660,419.03 660,143 734,69 1021,69 1050,98 U6.2@1050,143 1050,264 1158,372 1158,547 1244,633 Q1.3@1410,633 ; 773,814 1284,814 ; C39.1@1844,2501 C38.1@1844,2621 1904.55,2681.55 U22.3@1904.55,2809.98
  Top Layer w30: P3.3@160,720 347,720 351.03,724.03 v1(362,735) ; U5.3@687.55,796 v3(755,796) ; v1(841,1799) 1002,1799 1051,1848 2080,1848 v1(2082,1850) ; C39.1@1844,2501 2030,2501 v1(2032,2499)
  Bottom Layer w15: Q1.3@1410,633 v1(1410,745)
  Bottom Layer w30: v1(362,735) 423,796 ; v3(755,796) 423,796 ; v1(841,1799) 766,1799 491,1524 491,864 423,796 ; v1(2032,2499) 2082,2449 v1(2082,1850)
VCC12: P3.1 R19.2 R23.2 R28.2 R31.2 R35.2 R40.2 R43.2 R47.2 | length 6380
  Top Layer w15: R47.2@255,3978 255,4025 285,4055 485,4055 ; v1(441,3975) 444,3978 R43.2@515,3978 515,4025 485,4055 ; R40.2@775,3978 775,4026 746,4055 ; 1007,4055 746,4055 ; R35.2@1035,3978 1035,4027 1008,4054 1274,4054 1275,4055 ; R31.2@1295,3978 1295,4035 1275,4055 ; R28.2@1555,3978 1555,4026 1526,4055 ; R23.2@1817,3976 R23.2@1815,3978 1815,4023 1783,4055 ; R19.2@2075,3978 2075,4024 2044,4055 1783,4055 ; 485,4055 746,4055 ; 1275,4055 1526,4055 ; 1526,4055 1783,4055
  Bottom Layer w20: P3.1@160,440 298,440 317,459 317,3277 422,3382 ; 350,3310 422,3382 ; v1(441,3975) 422,3956 422,3382
pads on no net: J1.11 J1.17 J1.19 K1.5 K2.5 K3.5 K4.5 K5.5 P2.5 U1.2 U1.45 U5. U6.3 U6.16 U6.18 U22. Y2.3

## Keep-outs
Keep-Out Layer:
  lines w10: -10,2502 -10,2522 ; 50,2492 -10,2512 ; 50,2532 -10,2512 ; 140,35 160,95 ; 140,297 160,237 ; 150,95 170,95 ; 150,237 170,237 ; 160,-5 160,95 ; 160,337 160,237 ; 180,35 160,95 ; 180,297 160,237 ; 999.09,2512 -10,2512 ; 1560.91,2512 2570,2512 ; 2510,2492 2570,2512 ; 2510,2532 2570,2512 ; 2542.17,61.06 2562,1 ; 2548.83,2464.06 2569,2524 ; 2550.93,3080.98 2571,3021 ; 2551.69,2456.05 2571.62,2516.08 ; 2552,1.03 2572,0.97 ; 2559,2524.03 2579,2523.97 ; 2561,3020.99 2581,3021.01 ; 2561.62,2516.07 2581.62,2516.09 ; 2564.5,901.61 2562,1 ; 2566.5,1623.39 2569,2524 ; 2570,2502 2570,2522 ; 2570.88,3121 2571,3021 ; 2571.74,2416.08 2571.62,2516.08 ; 2574.09,2499.39 2574.08,2519.39 ; 2582.17,60.94 2562,1 ; 2588.83,2463.94 2569,2524 ; 2590.93,3081.02 2571,3021 ; 2591.69,2456.1 2571.62,2516.08 ; 2634.09,2489.41 2574.09,2509.39 ; 2634.08,2529.41 2574.09,2509.39 ; 3543.17,2509.78 2574.09,2509.39 ; 4105,2510 5074.09,2510.39 ; 5014.09,2490.36 5074.09,2510.39 ; 5014.08,2530.36 5074.09,2510.39 ; 5074.09,2500.39 5074.08,2520.39
  text "504.921 (mil)" at 2426.92,3119.25 h60 r270.07
  text "2580 (mil)" at 1009.09,2476.01 h60
  text "2500 (mil)" at 3553.19,2473.79 h60 r0.02
  text "2523.01 (mil)" at 2600.52,911.51 h60 r89.84
  text "142 (mil)" at 280.79,60.46 h60 r90

## Silkscreen, mask and mechanical layers (free items; w line width, h text height)
Top Overlay:
  text "雅酷佳V2.0" at 3107,328.71 h150
Mechanical 1:
  lines w15: -5,-104 -5,-7 ; -5,4363 -5,-7 ; -4,4363 5076,4363 ; 5076,-104 5076,-7 ; 5173,-7 5076,-7 ; 5173,4363 5076,4363 ; -5,-7 3393,-7 3489,-7 5076,-7 ; 5076,-7 5076,4363

## Dimensions
2163.57,2735.57 to -4,4363 on Keep-Out Layer
2163.57,2735.57 to -5,4363 on Keep-Out Layer
163,4232 to 3516,4231 on Keep-Out Layer
5076,-7 to 5076,4363 on Keep-Out Layer
-5,-7 to 5076,-7 on Keep-Out Layer
163,4232 to 160,166 on Keep-Out Layer

## Text inside footprints (layer, text, board x,y; h text height)
J1: Top Overlay "2" at 3806,1635 h50 r270; Top Overlay "1" at 3706,1635 h50 r270; Top Overlay "19" at 3706,575 h50 r270; Top Overlay "20" at 3806,575 h50 r270
Q1: Top Overlay "1" at 1514.72,508.2 h59.05; Top Overlay "3" at 1505.67,603.08 h59.05